# Altium PCB Debug.PcbDoc
Units mil, origin at the board's own origin, x right, y up, seen from the top; angles counter-clockwise.
Board outline 2283.46 x 1299.21 mil, 2 copper layers (Top Layer, Bottom Layer); 6 components, 19 nets, 53 pads, 45 vias.
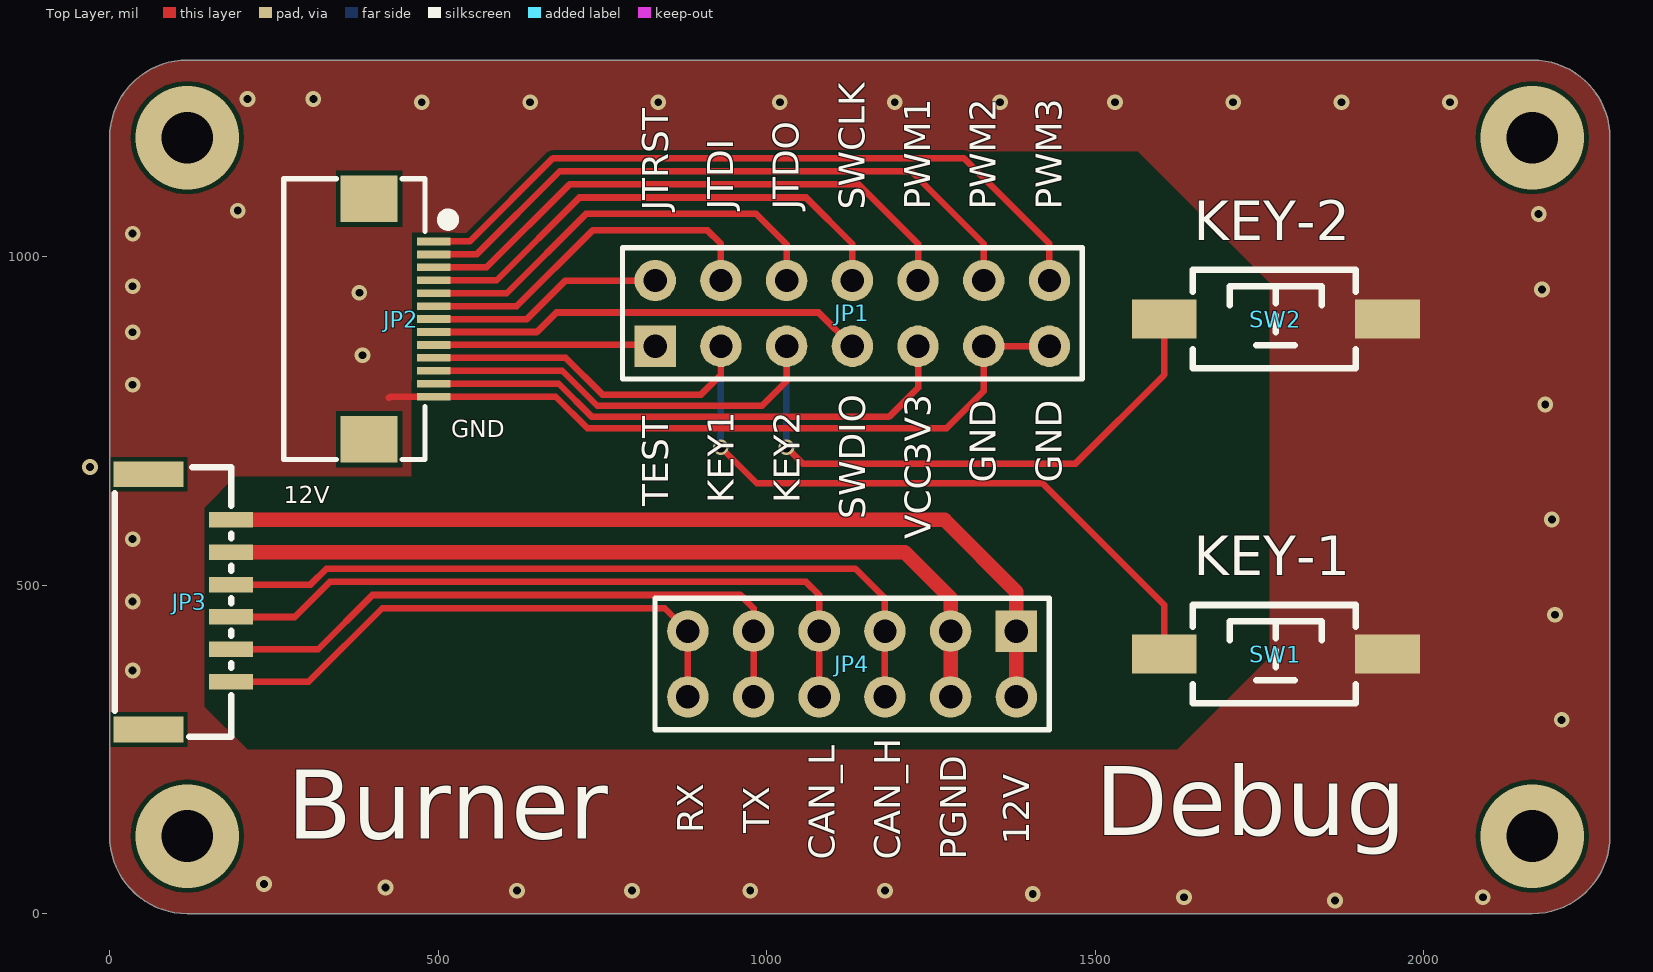
[diagram p0: Top Layer view]
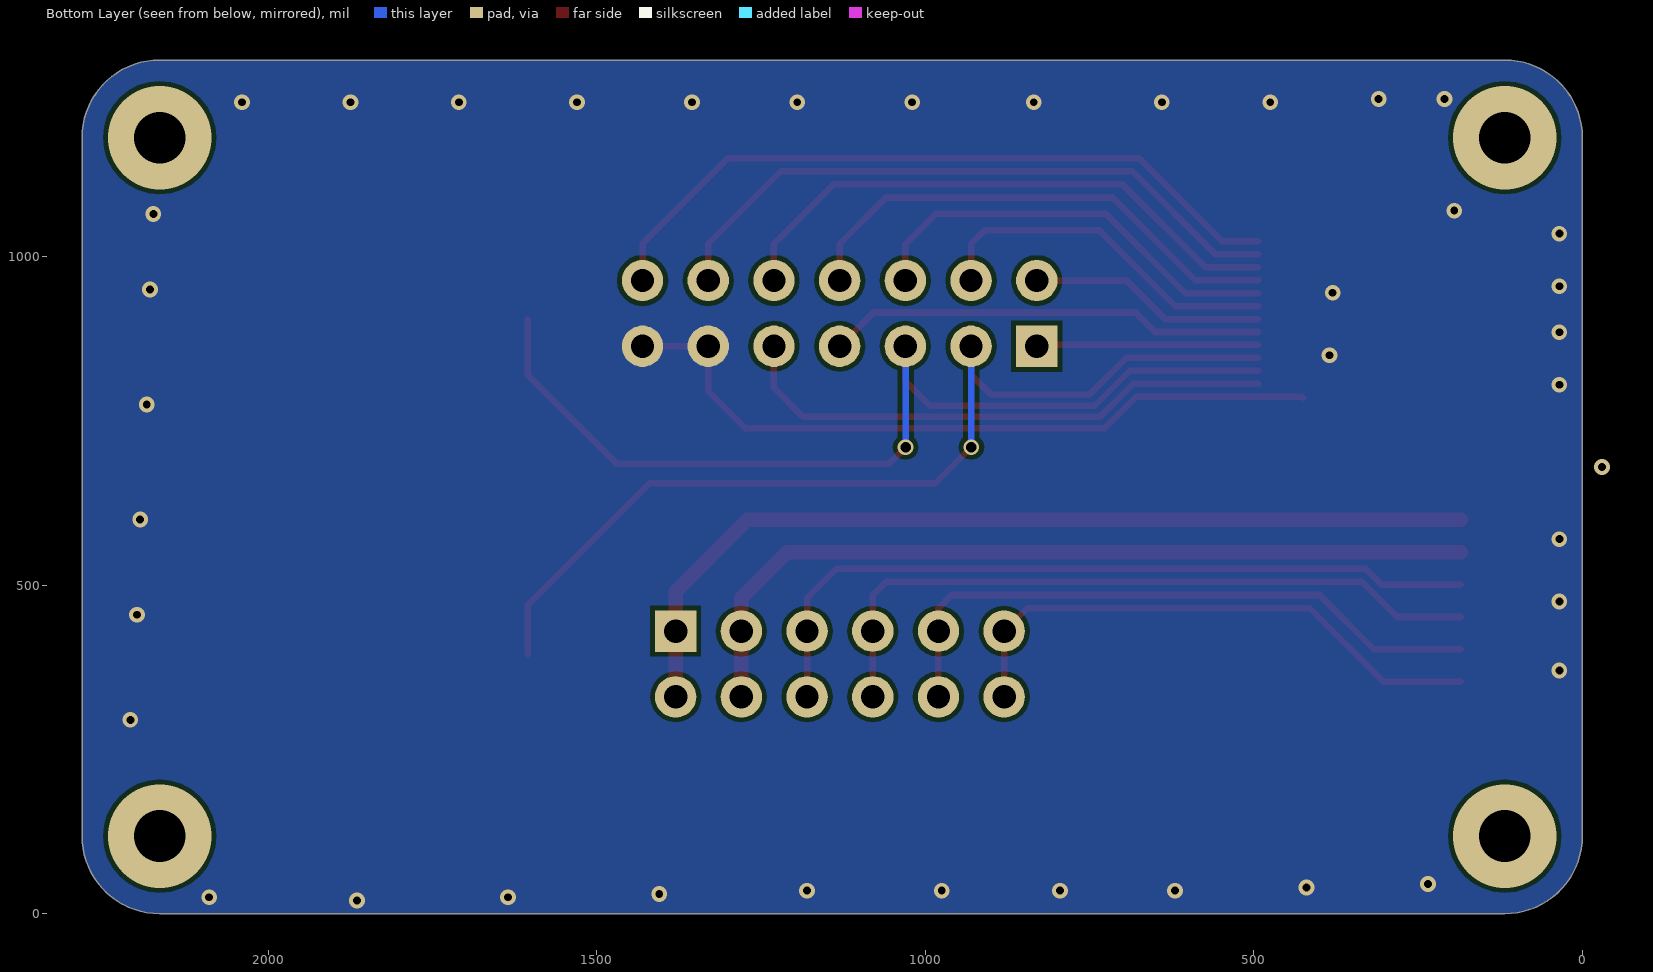
[diagram p1: Bottom Layer view, seen from below]

## Layer stack, top to bottom
Top Solder: solder mask 0.4, Solder Resist, Dk 3.5
Top Layer: signal copper 1.4
Dielectric 1: dielectric 12.6, FR-4, Dk 4.8
Bottom Layer: signal copper 1.4
Bottom Solder: solder mask 0.4, Solder Resist, Dk 3.5

## Board outline
118.11,0 cw(c118.11,118.11) 0,118.11 0,1181.1 cw(c118.11,1181.1) 118.11,1299.21 2165.35,1299.21 cw(c2165.35,1181.1) 2283.46,1181.1 2283.46,118.11 cw(c2165.35,118.11) 2165.35,0

## Design rules (kind name [scope] priority, off if disabled: settings)
Clearance [All] p1: gap=7 ignorepadtopadclearanceinfootprint=FALSE
PolygonConnect [All] p1: connectstyle=Direct reliefconductorwidth=10 reliefentries=4 polygonreliefangle="90 Angle" airgapwidth=10
RoutingVias [All] p1: holewidth=28 width=50 viastyle="Through Hole" minholewidth=12 minwidth=18 maxholewidth=800 maxwidth=800
SolderMaskExpansion [All] p1: expansion=4
Width [All] p1: maxlimit=60 minlimit=8 preferedwidth=10
30 further rules are at their usual default settings.

## Components (designator, comment, footprint, x,y, rotation, side; value= is the part's Value field where it differs from the comment)
JP1 "Header 2X7" HDR2.54-LI-2x7P 1130.39,913.62 r0 top
JP2 "HDR-1X13" FPC0.5-WT-13P 395,905 r270 top
JP3 "HDR-1X6" GH-1.25-6P 185,353.15 r90 top
JP4 "Header 6X2" HDR2.54-LI-2x6P 1130,380 r180 top
SW1 "6x6x5" "TSW SMD-3*6*4.3" 1775,395 r0 top
SW2 "6x6x5" "TSW SMD-3*6*4.3" 1775,905 r0 top

## Footprints (in the part's own frame and the unit in brackets; to place one, negate y for a bottom-side part, rotate by r counter-clockwise, add the part's x,y. Pads: shape width x height; smd on the part's side, far side on the other; paste and mask are expansions set on the pad)
FPC0.5-WT-13P [mm] "长：10.7mm，宽：5.2mm，高：2mm"
  rect 1.8x2.2 smd: 0(-4.65,0) 0(4.65,0)
  rect 0.3x1.3 smd: 1(-3,2.497) 2(-2.5,2.497) 3(-2,2.497) 4(-1.5,2.497) 5(-1,2.497) 6(-0.5,2.497) 7(0,2.497) 8(0.5,2.497) 9(1,2.497) 10(1.5,2.497) 11(2,2.497) 12(2.5,2.497) 13(3,2.497)
  silkscreen extent -5.43,-3.3 5.43,3.23, body extent -5.35,-3.15 5.35,2.85, height 2
GH-1.25-6P [mm]
  rect 1x2.7 smd: 0(-1.85,3.201) 0(8.019,3.2)
  rect 0.6x1.7 smd: 1(0,0) 2(1.25,0) 3(2.5,0) 4(3.75,0) 5(5,0) 6(6.25,0)
  silkscreen extent -2.12,0 8.29,4.5
HDR2.54-LI-2x6P [mm] "双排排针，6x2脚"
  rect 1.6x1.6 hole 0.9: 1(-6.35,-1.27)
  round 1.6 hole 0.9: 2(-6.35,1.27) 3(-3.81,-1.27) 4(-3.81,1.27) 5(-1.27,-1.27) 6(-1.27,1.27) 7(1.27,-1.27) 8(1.27,1.27) 9(3.81,-1.27) 10(3.81,1.27) 11(6.35,-1.27) 12(6.35,1.27)
  silkscreen extent -7.62,-2.54 7.62,2.54, body extent -7.62,-2.54 7.62,2.54, height 8.5
HDR2.54-LI-2x7P [mm] "双排排针，7x2脚"
  rect 1.6x1.6 hole 0.9: 1(-7.62,-1.27)
  round 1.6 hole 0.9: 2(-7.62,1.27) 3(-5.08,-1.27) 4(-5.08,1.27) 5(-2.54,-1.27) 6(-2.54,1.27) 7(0,-1.27) 8(0,1.27) 9(2.54,-1.27) 10(2.54,1.27) 11(5.08,-1.27) 12(5.08,1.27) 13(7.62,-1.27) 14(7.62,1.27)
  silkscreen extent -8.89,-2.54 8.89,2.54, body extent -8.89,-2.54 8.89,2.54, height 8.5
"TSW SMD-3*6*4.3" [mm] "3*6*4.3mm"
  rect 2.5x1.5 smd: 1(-4.318,0) 2(4.318,0)
  silkscreen extent -3.21,-1.9 3.09,1.9, body extent -4.6,-1.75 4.6,1.75, height 4.4

## Part data
JP1: library part "Header 7X2", "7*2P接插件"
JP2: library part "Header 13", "13P连接器", BOM名称=13P连, 联系卖家 免费技术支持=封装
JP3: library part "Header 6", "6P接插件", BOM名称=6P接
JP4: library part "Header  6X2", "6*2P接插件"
SW1 SW2: library part "TSW SMD-6x6", "贴片6x6轻触开关"

## Via types
v1: diameter 24, hole 12, Top Layer to Bottom Layer, tented both sides, 39 vias
v2: diameter 157.48, hole 78.74, Top Layer to Bottom Layer, tented both sides, 4 vias
v3: diameter 24, hole 15.75, Top Layer to Bottom Layer, tented both sides, 2 vias

## Nets (pads, with @x,y where several pads share a name; then routed paths per layer and width w, separated by ;. In a path a pad name is that pad's centre, name@x,y a point inside that pad or via, vN(x,y) a via of type N, cw(c..) or ccw(c..) an arc to the next point about the centre after c; other vN are vias at no path point)
12V: JP3.6 JP4.1 JP4.2 | length 1400.2
  Top Layer w22: JP3.6 1270.79,599.21 1380,490 JP4.1 JP4.2
CAN_H: JP3.4 JP4.5 JP4.6 | length 1173.7
  Top Layer w10: JP3.4 305.79,500.79 330,525 1135,525 1180,480 JP4.5 JP4.6
CAN_L: JP3.3 JP4.7 JP4.8 | length 1080.4
  Top Layer w10: JP3.3 281.57,451.57 335,505 1060,505 1080,485 JP4.7 JP4.8
GND: JP1.11 JP1.13 JP2.13 SW1.2 SW2.2 | length 1117.6
  Top Layer w10: 425,785 426.89,786.89 JP2.13 679.07,786.89 726.96,739 1274,739 1330.39,795.39 JP1.11 JP1.13
  other v1: 1865,20 1635,25 2090,25 1405,30 620,35 795,35 975,35 1180,35 420,40 235,45 2210,295 35,370 2200,455 35,475 35,570 2195,600 2185,775 35,805 385,850 35,885 380,945 2180,950 35,955 35,1035 2175,1065 195,1070 475,1235 640,1235 835,1235 1020,1235 1195,1235 1355,1235 1530,1235 1710,1235 1875,1235 2040,1235 210,1240 310,1240
IN1: JP1.10 JP2.3 | length 882.8
  Top Layer w10: JP2.3 573.74,983.74 700,1110 1140,1110 1230.39,1019.61 JP1.10
IN2: JP1.12 JP2.2 | length 991.2
  Top Layer w10: JP2.2 558.43,1003.43 685,1130 1220,1130 1330.39,1019.61 JP1.12
IN3: JP1.14 JP2.1 | length 1099.6
  Top Layer w10: JP2.1 548.11,1023.11 675,1150 1300,1150 1430.39,1019.61 JP1.14
KEY_1: JP1.3 JP2.10 SW1.1 | length 1519.3
  Top Layer w10: JP2.10 694.05,845.95 750,790 900,790 930.39,820.39 JP1.3 ; v3(930,710) 985,655 1420,655 1605,470 SW1.1
  Bottom Layer w10: v3(930,710) 930,863.23 JP1.3
KEY_2: JP1.5 JP2.11 SW2.1 | length 1512.1
  Top Layer w10: JP2.11 688.74,826.26 742,773 993,773 1030.39,810.39 JP1.5 ; v3(1030,710) 1055,685 1470,685 1605,820 SW2.1
  Bottom Layer w10: v3(1030,710) 1030,853.23 1025,858.23 JP1.5
PGND: JP3.5 JP4.3 JP4.4 | length 1274
  Top Layer w22: JP3.5 1210,550 1280,480 JP4.3 JP4.4
RX: JP3.1 JP4.11 JP4.12 | length 855.8
  Top Layer w10: JP3.1 303.15,353.15 415,465 845,465 JP4.11 JP4.12
SYS_JTCK-SWCLK: JP1.8 JP2.4 | length 774.4
  Top Layer w10: JP2.4 589.06,964.06 715,1090 1060,1090 1130.39,1019.61 JP1.8
SYS_JTDI: JP1.4 JP2.6 | length 549.3
  Top Layer w10: JP2.6 619.69,924.69 735,1040 910,1040 930.39,1019.61 JP1.4
SYS_JTDO-TRACESWO: JP1.6 JP2.5 | length 661.3
  Top Layer w10: JP2.5 604.37,944.37 725,1065 984.14,1065 1030.39,1018.75 JP1.6
SYS_JTMS-SWDIO: JP1.7 JP2.8 | length 670.7
  Top Layer w10: JP2.8 650.32,885.32 680,915 1079.02,915 JP1.7
SYS_NJTRST: JP1.2 JP2.7 | length 361.4
  Top Layer w10: JP2.7 635,905 693.62,963.62 JP1.2
Test_PIN: JP1.1 JP2.9 | length 337.9
  Top Layer w10: JP2.9 828.39,865.63 JP1.1
TX: JP3.2 JP4.9 JP4.10 | length 972.5
  Top Layer w10: JP3.2 317.36,402.36 400,485 960,485 980,465 JP4.9 JP4.10
VCC_3V3: JP1.9 JP2.12 | length 839.7
  Top Layer w10: JP2.12 683.42,806.58 734,756 1186,756 1230.39,800.39 JP1.9
pads on no net: JP2.0 JP3.0
copper on no net:
  other v1: -30,680
  other v2: 118.11,118.11 2165.35,118.11 118.11,1181.1 2165.35,1181.1

## Polygon pours and split planes (outlines as drawn)
GND on Bottom Layer "GND_L02_P001" (solid, remove dead copper, pour order 1): 118.11,0 cw(c118.11,118.11) 0,118.11 0,1181.1 cw(c118.11,1181.1) 118.11,1299.21 2165.35,1299.21 cw(c2165.35,1181.1) 2283.46,1181.1 2283.46,118.11 cw(c2165.35,118.11) 2165.35,0
GND on Top Layer "GND_L01_P000" (solid, remove dead copper, pour order 0): 118.11,0 cw(c118.11,118.11) 0,118.11 0,1181.1 cw(c118.11,1181.1) 118.11,1299.21 2165.35,1299.21 cw(c2165.35,1181.1) 2283.46,1181.1 2283.46,118.11 cw(c2165.35,118.11) 2165.35,0

## Other copper
Top Layer:
  pour cut-out: 144.54,618.02 191.51,665 460,665 460,810 810,1160 1565,1160 1765,960 1765,390 1625,250 210,250 145,315

## Silkscreen, mask and mechanical layers (free items; w line width, h text height)
Top Overlay:
  text "JTDI" at 949,1071 h40 r90
  text "JTDO" at 1049,1071 h40 r90
  text "SWCLK" at 1149,1071 h40 r90
  text "PWM1" at 1249,1071 h40 r90
  text "PWM2" at 1349,1071 h40 r90
  text "PWM3" at 1449,1071 h40 r90
  text "JTRST" at 850,1070 h40 r90
  text "KEY-2" at 1650,1025 h60
  text "GND" at 520,725 h26
  text "GND" at 1349,656 h40 r90
  text "GND" at 1449,656 h40 r90
  text "12V" at 265,625 h26
  text "KEY1" at 950,625 h40 r90
  text "KEY2" at 1050,625 h40 r90
  text "TEST" at 850,620 h40 r90
  text "SWDIO" at 1150,600 h40 r90
  text "VCC3V3" at 1250,570 h40 r90
  text "KEY-1" at 1650,515 h60
  text "RX" at 903.61,122.38 h40 r90
  text "TX" at 1003.61,122.38 h40 r90
  text "12V" at 1400,105 h40 r90
  text "Debug" at 1500,85 h180
  text "CAN_L" at 1103.61,82.38 h40 r90
  text "CAN_H" at 1203.61,82.38 h40 r90
  text "PGND" at 1303.61,82.38 h40 r90
  text "Burner" at 270,80 h180
Mechanical 1:
  the board outline again, w10